# Altium PCB PCB1.PcbDoc
Units mil, origin at the board's own origin, x right, y up, seen from the top; angles counter-clockwise.
Board outline 710.63 x 1732.28 mil, 2 copper layers (Top Layer, Bottom Layer); 16 components, 18 nets, 58 pads, 13 vias.
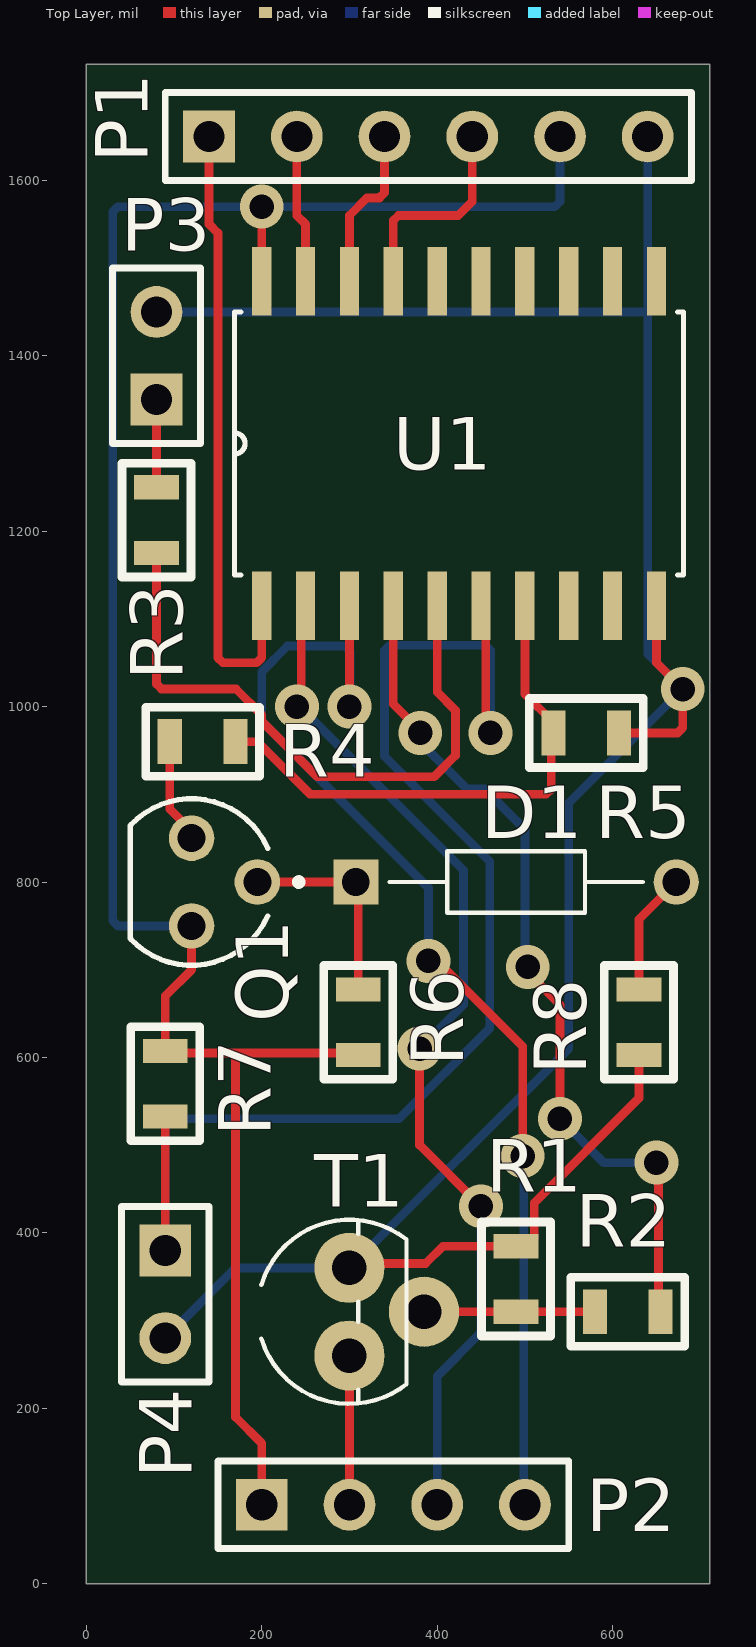
[diagram p0: Top Layer view]
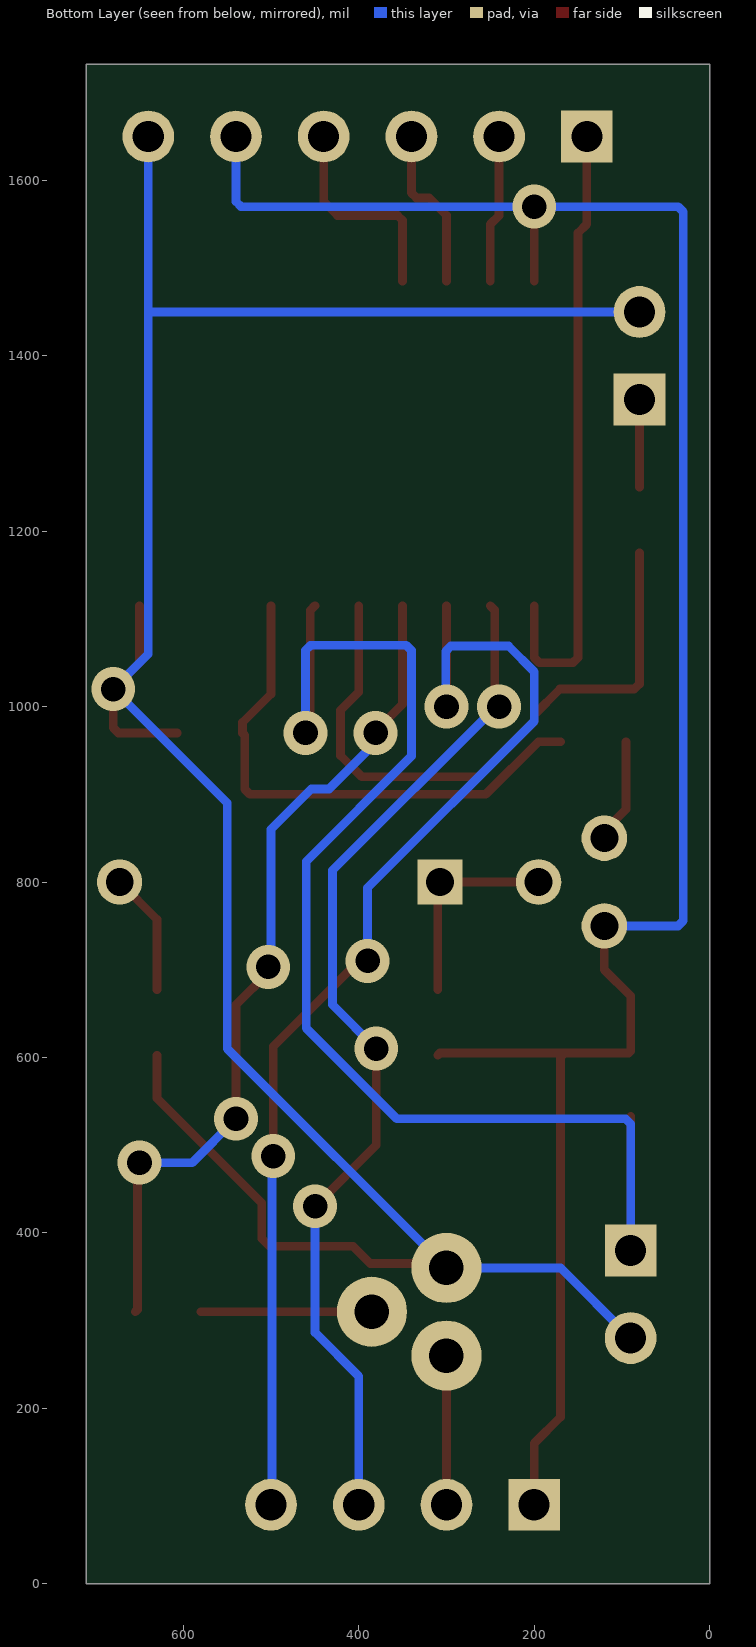
[diagram p1: Bottom Layer view, seen from below]

## Layer stack, top to bottom
Top Solder: solder mask 0.4, Solder Resist, Dk 3.5
Top Layer: signal copper 1.4
Dielectric 1: dielectric 12.6, FR-4, Dk 4.8
Bottom Layer: signal copper 1.4
Bottom Solder: solder mask 0.4, Solder Resist, Dk 3.5

## Board outline
0,0 0,1732.28 710.63,1732.28 710.63,1240.16 710.63,413.39 710.63,0

## Design rules (kind name [scope] priority, off if disabled: settings)
Clearance [All] p1: gap=10 ignorepadtopadclearanceinfootprint=FALSE except(0: Arc-Hole Track-Hole SMDPad-Hole THPad-Hole Via-Hole Fill-Hole Poly-Hole Region-Hole Text-Hole)
PolygonConnect [All] p1: connectstyle=Relief reliefconductorwidth=10 reliefentries=4 polygonreliefangle="90 Angle" airgapwidth=10
RoutingVias [All] p1: holewidth=28 width=50 viastyle="Through Hole" minholewidth=28 minwidth=50 maxholewidth=28 maxwidth=50
SolderMaskExpansion [All] p1: expansion=4 istentingtop=FALSE
Width [All] p1: maxlimit=10 minlimit=10 preferedwidth=10
30 further rules are at their usual default settings.

## Components (designator, comment, footprint, x,y, rotation, side; value= is the part's Value field where it differs from the comment)
D1 "BZX55C3V9_R0G" DIOAD928W47L399D179 490,800 r0 top
P1 "PROG" HDR1X6 140,1650 r0 top
P2 "BLUEZ" HDR1X4 200,90 r0 top
P3 "LED" HDR1X2 80,1350 r90 top
P4 "SENSOR" HDR1X2 90,380 r270 top
Q1 "BC557" SOT54A 120,800 r270 top
R1 "10K" "RES 0805" 490,347.4 r90 top
R2 "3K" "RES 0805" 617.4,310 r0 top
R3 "2.4K" "RES 0805" 80,1212.6 r90 top
R4 "10K" "RES 0805" 132.6,960 r0 top
R5 "82K" "RES 0805" 570,970 r0 top
R6 "20K" "RES 0805" 310,640 r90 top
R7 "10K" "RES 0805" 90,570 r90 top
R8 "62K" "RES 0805" 630,640 r270 top
T1 "BC547" TO92 300,310 r90 top
U1 "ATTINY2313-20SUR" SOIC127P1032X265-20N 425,1300 r90 top

## Footprints (in the part's own frame and the unit in brackets; to place one, negate y for a bottom-side part, rotate by r counter-clockwise, add the part's x,y. Pads: shape width x height; smd on the part's side, far side on the other; paste and mask are expansions set on the pad)
DIOAD928W47L399D179 [mm]
  round 1.308 hole 0.8: A(4.64,0)
  rect 1.308x1.308 / inner round 1.308 / far side rect 1.308x1.308 hole 0.8: C(-4.64,0)
  silkscreen extent -6.39,-0.9 3.67,0.9, body extent -4.87,-1.14 4.87,1.14, height 2.28
HDR1X2 [mm] "Connector; Header; 2 Position"
  rect 1.5x1.5 hole 0.9: 1(0,0)
  round 1.5 hole 0.9: 2(2.54,0)
  silkscreen extent -1.27,-1.27 3.81,1.27
HDR1X4 [mm] "Connector; Header; 4 Position"
  rect 1.5x1.5 hole 0.9: 1(0,0)
  round 1.5 hole 0.9: 2(2.54,0) 3(5.08,0) 4(7.62,0)
  silkscreen extent -1.27,-1.27 8.89,1.27
HDR1X6 [mm] "Connector; Header; 6 Position"
  rect 1.5x1.5 hole 0.9: 1(0,0)
  round 1.5 hole 0.9: 2(2.54,0) 3(5.08,0) 4(7.62,0) 5(10.16,0) 6(12.7,0)
  silkscreen extent -1.27,-1.27 13.97,1.27
"RES 0805" [mm]
  rect 0.7x1.3 smd: 1(-0.95,0) 2(0.95,0)
  silkscreen extent -1.65,-1 1.65,1
SOIC127P1032X265-20N [mil]
  rect 78x22 smd: 1(-185,225) 2(-185,175) 3(-185,125) 4(-185,75) 5(-185,25) 6(-185,-25) 7(-185,-75) 8(-185,-125) 9(-185,-175) 10(-185,-225) 11(185,-225) 12(185,-175) 13(185,-125) 14(185,-75) 15(185,-25) 16(185,25) 17(185,75) 18(185,125) 19(185,175) 20(185,225)
  silkscreen extent -150,-256 150,256
SOT54A [mil]
  round 52 hole 32: B(0,75) C(-50,0) E(50,0)
  silkscreen extent -95,-70 95,87, body extent -94,-60 94,94, height 305
TO92 [mil]
  round 80 hole 39.37: 1(50,0) 2(0,-85) 3(-50,0)
  silkscreen extent -105,-65 105,100

## Part data
D1: Package=None, Availability=Unavailable, MP=altium_native_batch, Price=None
P1: library part "Header 6", "Header, 6-Pin", LatestRevisionDate=17-Jul-2002, LatestRevisionNote="Re-released for DXP Platform.", Publisher="Altium Limited"
P2: library part "Header 4", "Header, 4-Pin", LatestRevisionDate=17-Jul-2002, LatestRevisionNote="Re-released for DXP Platform.", Publisher="Altium Limited"
P3 P4: library part "Header 2", "Header, 2-Pin", LatestRevisionDate=17-Jul-2002, LatestRevisionNote="Re-released for DXP Platform.", Publisher="Altium Limited"
Q1: "Bipolar (BJT) Transistor PNP 45 V 100 mA 320MHz 625 mW Through Hole TO-92 (TO-226)", Package="E-PKG AXIAL-LEADED-2 ON Semiconductor", Availability="In Stock", Check_prices=https://www.snapeda.com/parts/BC557/Onsemi/view-part/?ref=eda, MF="ON Semiconductor", MP=BC557, Price=None, Purchase-URL=https://pricing.snapeda.com/search/part/BC557/?ref=eda, SnapEDA_Link=https://www.snapeda.com/parts/BC557/Onsemi/view-part/?ref=snap
R1 R2 R3 R4 R5 R6 R7 R8: library part RES
T1: "Trans GP BJT NPN 45V 0.1A 500mW 3-Pin TO-92 T/R", Package=None, Availability="In Stock", Check_prices=https://www.snapeda.com/parts/BC547/Onsemi/view-part/?ref=eda, MF="ON Semiconductor", MP=BC547, Price=None, Purchase-URL=https://pricing.snapeda.com/search/part/BC547/?ref=eda, SnapEDA_Link=https://www.snapeda.com/parts/BC547/Onsemi/view-part/?ref=snap
U1: "AVR series Microcontroller IC 8-Bit 20MHz 2KB (1K x 16) FLASH 20-SOIC", Package="SOIC-20 Microchip Technology", Availability="In Stock", Check_prices=https://www.snapeda.com/parts/ATTINY2313-20SUR/Microchip/view-part/?ref=eda, MF="Microchip Technology", MP=ATTINY2313-20SUR, Price=None, Purchase-URL=https://pricing.snapeda.com/search/part/ATTINY2313-20SUR/?ref=eda, SnapEDA_Link=https://www.snapeda.com/parts/ATTINY2313-20SUR/Microchip/view-part/?ref=snap

## Via types
v1: diameter 50, hole 28, Top Layer to Bottom Layer, 13 vias

## Nets (pads, with @x,y where several pads share a name; then routed paths per layer and width w, separated by ;. In a path a pad name is that pad's centre, name@x,y a point inside that pad or via, vN(x,y) a via of type N, cw(c..) or ccw(c..) an arc to the next point about the centre after c; other vN are vias at no path point)
GND: P1.6 P3.2 P4.2 R1.2 R5.2 R8.2 T1.1 U1.10 | length 2976.7
  Top Layer w10: T1.1 305,365 386.77,365 406.58,384.8 R1.2 501.81,384.8 510.59,393.58 510.59,434 630,553.41 R8.2 ; R5.2 674.14,970 680,975.86 v1(680,1020) 650,1050 U1.10
  Bottom Layer w10: P3.2 640,1450 ; P4.2 170,360 T1.1 550,610 550,890 v1(680,1020) 640,1060 640,1450 ; P1.6 640,1450
NetD1_A: D1.A R8.1 | length 140.3
  Top Layer w10: R8.1 630,757.32 D1.A
NetD1_C: D1.C Q1.B R6.2 | length 236
  Top Layer w10: Q1.B D1.C 310,797.32 R6.2
NetP1_1: P1.1 U1.1 | length 712.3
  Top Layer w10: P1.1 140,1550 150,1540 150,1055.86 155.86,1050 194.14,1050 200,1055.86 U1.1
NetP1_2: P1.2 U1.19 | length 169.1
  Top Layer w10: P1.2 240,1560 250,1550 U1.19
NetP1_3: P1.3 U1.18 | length 189.9
  Top Layer w10: U1.18 300,1560 320,1580 334.14,1580 340,1585.86 P1.3
NetP1_4: P1.4 U1.17 | length 242.3
  Top Layer w10: U1.17 350,1554.14 355.86,1560 424.14,1560 440,1575.86 P1.4
NetP2_2: P2.2 T1.3 | length 170
  Top Layer w10: P2.2 T1.3
NetP2_3: P2.3 U1.2 | length 1180.1
  Top Layer w10: v1(240,1000) 245,1005 245,1110 U1.2 ; v1(380,610) 380,500.21 v1(449.82,430.4)
  Bottom Layer w10: v1(240,1000) 243.43,1000 430,813.43 430,660 v1(380,610) ; P2.3 400,236.51 449.82,286.33 v1(449.82,430.4)
NetP2_4: P2.4 U1.3 | length 1374
  Top Layer w10: v1(300,1000) U1.3 ; v1(390,710) 400,710 497.57,612.43 v1(497.57,487.57)
  Bottom Layer w10: v1(300,1000) 300.93,1000.93 300.93,1063.22 295.07,1069.07 229.29,1069.07 200,1039.79 200,983.43 390,793.43 v1(390,710) ; v1(497.57,487.57) 498.79,486.36 498.79,91.21 P2.4
NetP3_1: P3.1 R3.2 | length 100
  Top Layer w10: R3.2 P3.1
NetP4_1: P4.1 R7.1 U1.6 | length 1561.6
  Top Layer w10: P4.1 R7.1 ; U1.6 455.38,1109.62 455.38,975.38 v1(460.76,970)
  Bottom Layer w10: P4.1 90,524.14 95.86,530 356.57,530 460,633.43 460,823.43 340,943.43 340,1064.14 345.86,1070 454.9,1070 460.76,1064.14 v1(460.76,970)
NetQ1_C: Q1.C R4.1 | length 120.3
  Top Layer w10: R4.1 95.2,883.18 120,858.38 Q1.C
NetR1_1: R1.1 R2.1 T1.2 | length 195
  Top Layer w10: T1.2 R1.1 R2.1
NetR2_2: R2.2 U1.4 | length 978.1
  Top Layer w10: U1.4 350,1002.88 380.76,972.12 v1(380.76,970) ; v1(503.28,703.28) 503.28,696.72 540,660 v1(540,530) ; v1(650,480) 652.4,477.6 652.4,312.4 R2.2
  Bottom Layer w10: v1(380.76,970) 380.76,959.24 433.83,906.17 453.83,906.17 500,860 500,706.57 v1(503.28,703.28) ; v1(540,530) 590,480 v1(650,480)
NetR3_1: R3.1 U1.5 | length 727.6
  Top Layer w10: R3.1 80,1025.86 85.86,1020 170.58,1020 200,990.58 200,983.43 263.43,920 396.57,920 420.76,944.19 420.76,995.81 400,1016.57 U1.5
NetR4_2: R4.2 R5.1 U1.7 | length 611
  Top Layer w10: R4.2 195.15,960 255.15,900 524.14,900 530,905.86 530,967.4 R5.1 532.6,981.81 500,1014.41 U1.7
VCC: P1.5 P2.1 Q1.E R6.1 R7.2 U1.20 | length 2481.2
  Top Layer w10: Q1.E 120,700 90,670 R7.2 92.4,605 165,605 ; P2.1 200,160 170,190 170,600 165,605 ; U1.20 v1(200,1570) ; R6.1 307.6,605 165,605
  Bottom Layer w10: Q1.E 35.86,750 30,755.86 30,1564.14 35.86,1570 v1(200,1570) 534.14,1570 540,1575.86 P1.5
pads on no net: U1.8 U1.9 U1.11 U1.12 U1.13 U1.14 U1.15 U1.16

## Silkscreen, mask and mechanical layers (free items; w line width, h text height)
Mechanical 1:
  lines w10: 708.66,0 0,0 0,1732.28 710.63,1732.28 710.63,1240.16 710.63,413.39 710.63,0

## Text inside footprints (layer, text, board x,y; h text height)
T1: Mechanical 13 "1" at 300,355 h50 r90; Mechanical 13 "3" at 300,225 h50 r90; Mechanical 13 "2" at 275,285 h50 r90